# Altium PCB Rocket_Stack_Template_v1.PcbDoc
Units mil, origin at the board's own origin, x right, y up, seen from the top; angles counter-clockwise.
Board outline 2366.3 x 3345.45 mil, 2 copper layers (Top Layer, Bottom Layer); 3 components, 29 nets, 32 pads, 0 vias.
Unrouted connection lines stored in the file: 1.
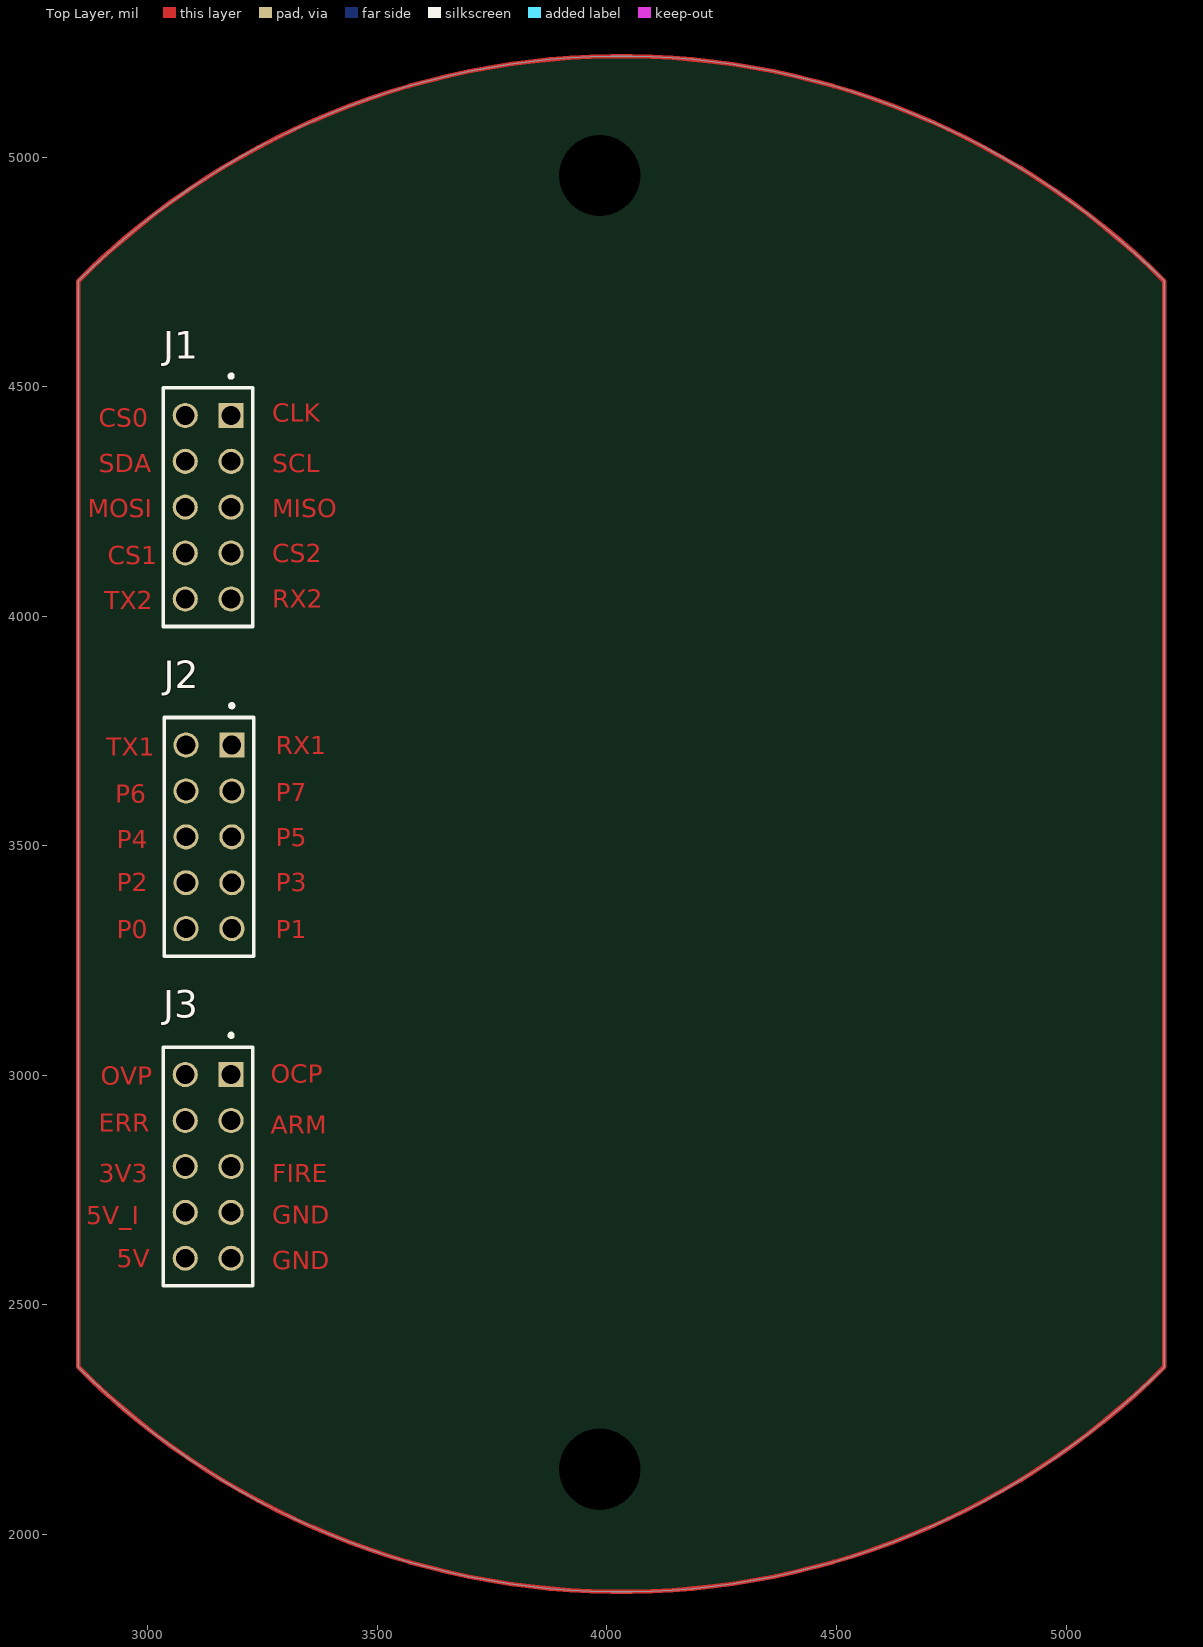
[diagram p0: Top Layer view]
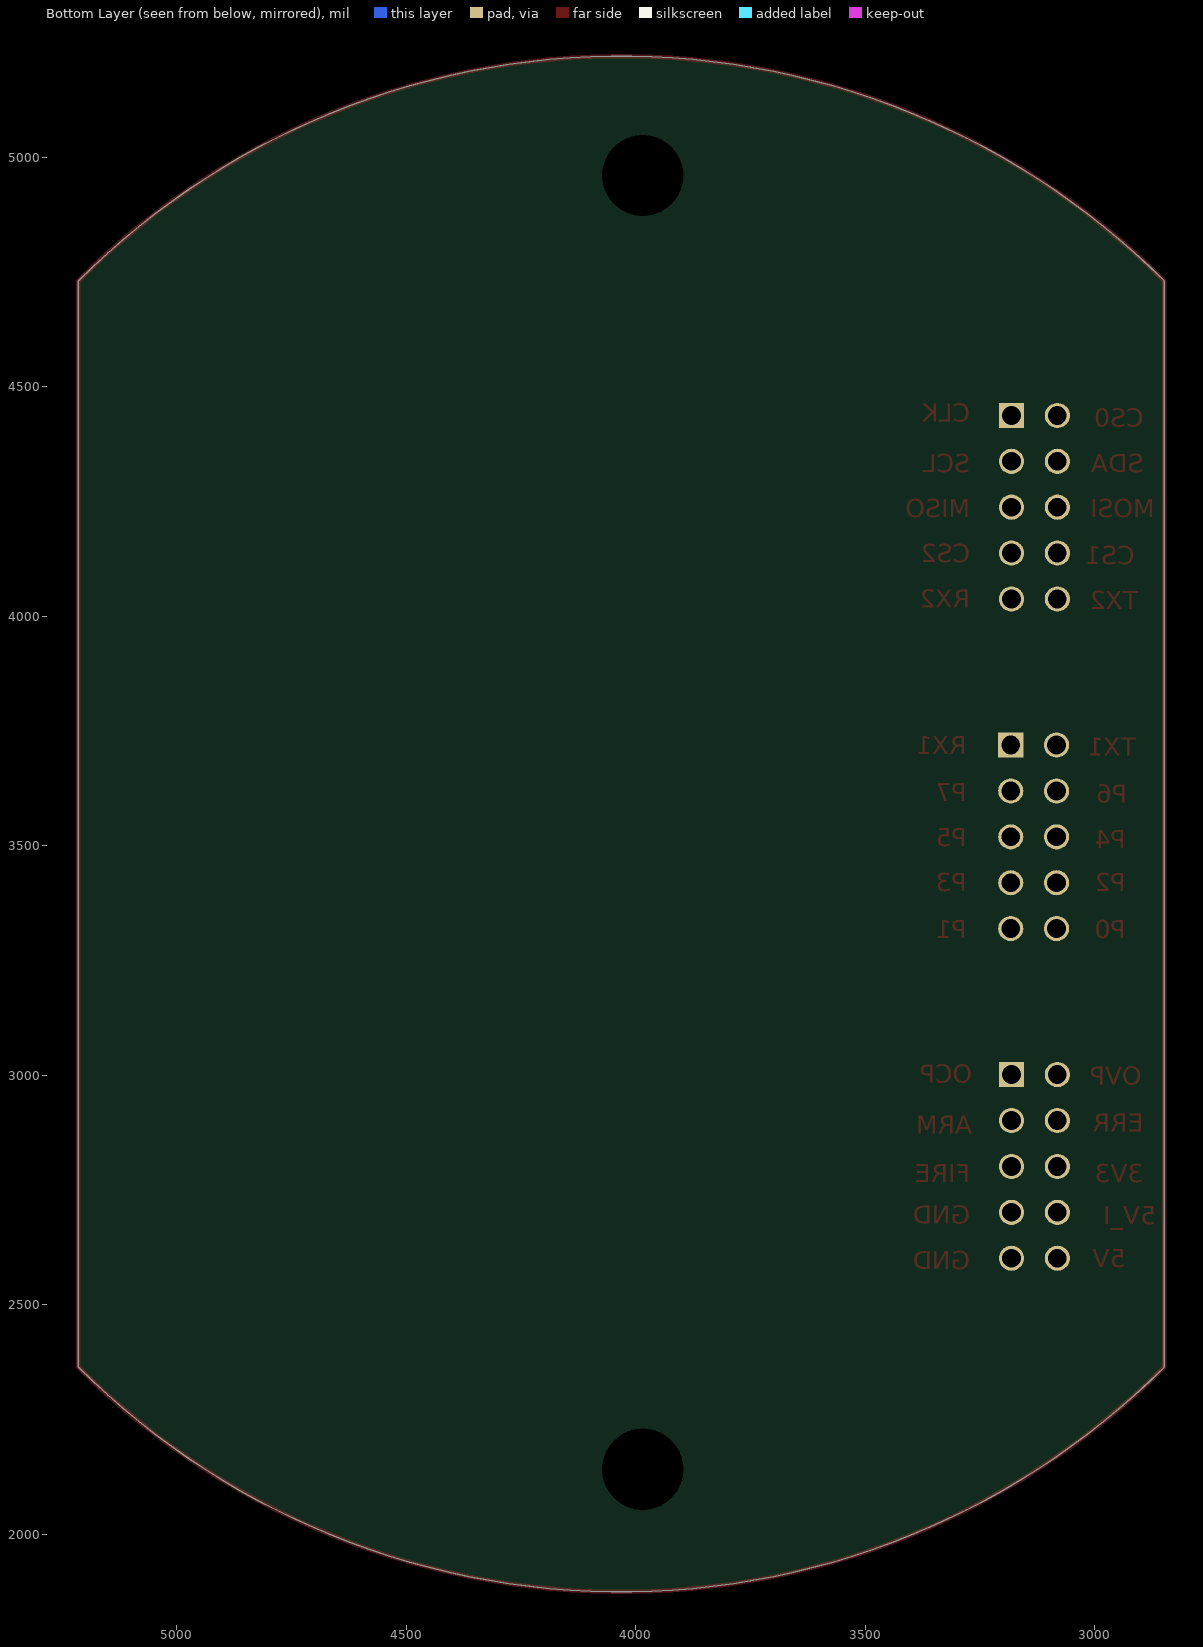
[diagram p1: Bottom Layer view, seen from below]

## Layer stack, top to bottom
Top Solder: solder mask 0.4, Solder Resist, Dk 3.5
Top Layer: signal copper 1.4
Dielectric 1: dielectric 12.6, FR-4, Dk 4.8
Bottom Layer: signal copper 1.4
Bottom Solder: solder mask 0.4, Solder Resist, Dk 3.5

## Board outline
2847.97,2364.8 ccw(c4031.12,3547.95) 5214.27,2364.8 5214.27,4730.4 ccw(c4031.12,3547.24) 2847.97,4730.4

## Design rules (kind name [scope] priority, off if disabled: settings)
Clearance [All] p1: gap=10 ignorepadtopadclearanceinfootprint=FALSE
PolygonConnect [All] p1: connectstyle=Relief reliefconductorwidth=10 reliefentries=4 polygonreliefangle="90 Angle" airgapwidth=10
RoutingVias [All] p1: holewidth=28 width=50 viastyle="Through Hole" minholewidth=28 minwidth=50 maxholewidth=28 maxwidth=50
SolderMaskExpansion [All] p1: expansion=4 istentingtop=FALSE
SupplyNets "Schematic Supply Nets_28" [InNet('USART1_TX')] p1: voltage=0.000
SupplyNets "Schematic Supply Nets_27" [InNet('GPIO4')] p2: voltage=0.000
SupplyNets "Schematic Supply Nets_26" [InNet('GPIO1')] p3: voltage=0.000
SupplyNets "Schematic Supply Nets_25" [InNet('GPIO3')] p4: voltage=0.000
SupplyNets "Schematic Supply Nets_24" [InNet('GPIO5')] p5: voltage=0.000
SupplyNets "Schematic Supply Nets_23" [InNet('USART1_RX')] p6: voltage=0.000
SupplyNets "Schematic Supply Nets_22" [InNet('GPIO2')] p7: voltage=0.000
SupplyNets "Schematic Supply Nets_21" [InNet('GPIO0')] p8: voltage=0.000
SupplyNets "Schematic Supply Nets_20" [InNet('GPIO6')] p9: voltage=0.000
SupplyNets "Schematic Supply Nets_19" [InNet('GPIO7')] p10: voltage=0.000
SupplyNets "Schematic Supply Nets_18" [InNet('GND')] p11: voltage=0.000
SupplyNets "Schematic Supply Nets_17" [InNet('5V')] p12: voltage=0.000
SupplyNets "Schematic Supply Nets_16" [InNet('OVP')] p13: voltage=0.000
SupplyNets "Schematic Supply Nets_15" [InNet('SPI_MISO')] p14: voltage=0.000
SupplyNets "Schematic Supply Nets_14" [InNet('CS0')] p15: voltage=0.000
SupplyNets "Schematic Supply Nets_13" [InNet('ARM')] p16: voltage=0.000
SupplyNets "Schematic Supply Nets_12" [InNet('12C_SDA')] p17: voltage=0.000
SupplyNets "Schematic Supply Nets_11" [InNet('FIRE')] p18: voltage=0.000
SupplyNets "Schematic Supply Nets_10" [InNet('5V_ISO')] p19: voltage=0.000
SupplyNets "Schematic Supply Nets_9" [InNet('USART2_TX')] p20: voltage=0.000
SupplyNets "Schematic Supply Nets_8" [InNet('SPI_CLK')] p21: voltage=0.000
SupplyNets "Schematic Supply Nets_7" [InNet('USART2_RX')] p22: voltage=0.000
SupplyNets "Schematic Supply Nets_6" [InNet('3V3')] p23: voltage=0.000
SupplyNets "Schematic Supply Nets_5" [InNet('CS1')] p24: voltage=0.000
SupplyNets "Schematic Supply Nets_4" [InNet('ERR')] p25: voltage=0.000
SupplyNets "Schematic Supply Nets_3" [InNet('OCP')] p26: voltage=0.000
SupplyNets "Schematic Supply Nets_2" [InNet('I2C_SCL')] p27: voltage=0.000
SupplyNets "Schematic Supply Nets_1" [InNet('CS2')] p28: voltage=0.000
SupplyNets "Schematic Supply Nets" [InNet('SPI_MOSI')] p29: voltage=0.000
Width [All] p1: maxlimit=10 minlimit=10 preferedwidth=10
30 further rules are at their usual default settings.

## Components (designator, comment, footprint, x,y, rotation, side; value= is the part's Value field where it differs from the comment)
J1 "SSW-105-02-G-D" SAMTEC_SSW-105-02-G-D 3181.1,4437.8 r90 top locked
J2 "SSW-105-02-G-D" SAMTEC_SSW-105-02-G-D 3182.68,3719.68 r90 top
J3 "SSW-105-02-G-D" SAMTEC_SSW-105-02-G-D 3181.1,3001.57 r90 top locked

## Footprints (in the part's own frame and the unit in brackets; to place one, negate y for a bottom-side part, rotate by r counter-clockwise, add the part's x,y. Pads: shape width x height; smd on the part's side, far side on the other; paste and mask are expansions set on the pad)
SAMTEC_SSW-105-02-G-D [mm]
  rect 1.39x1.39 hole 1.04: 01(0,0)
  round 1.39 hole 1.04: 02(0,2.54) 03(-2.54,0) 04(-2.54,2.54) 05(-5.08,0) 06(-5.08,2.54) 07(-7.62,0) 08(-7.62,2.54) 09(-10.16,0) 10(-10.16,2.54)
  silkscreen extent -11.69,-1.21 2.27,3.75

## Part data
J1 J2 J3: Package=None, Availability=Unavailable, MF="Samtec Inc.", MP=SSW-105-02-G-D, Price=None

## Free pads (board coordinates)
  round 0 hole 177.17 unplated: 1(3984.25,2141.73) 1(3984.25,4960.63)

## Nets (pads, with @x,y where several pads share a name; then routed paths per layer and width w, separated by ;. In a path a pad name is that pad's centre, name@x,y a point inside that pad or via, vN(x,y) a via of type N, cw(c..) or ccw(c..) an arc to the next point about the centre after c; other vN are vias at no path point)
3V3: J3.06
5V: J3.10
5V_ISO: J3.08
12C_SDA: J1.04
ARM: J3.03
CS0: J1.02
CS1: J1.08
CS2: J1.07
ERR: J3.04
FIRE: J3.05
GND: J3.07 J3.09
GPIO0: J2.10
GPIO1: J2.09
GPIO2: J2.08
GPIO3: J2.07
GPIO4: J2.06
GPIO5: J2.05
GPIO6: J2.04
GPIO7: J2.03
I2C_SCL: J1.03
OCP: J3.01
OVP: J3.02
SPI_CLK: J1.01
SPI_MISO: J1.05
SPI_MOSI: J1.06
USART1_RX: J2.01
USART1_TX: J2.02
USART2_RX: J1.09
USART2_TX: J1.10
copper on no net: | length 9987.8
  Top Layer w10: 2847.97,2364.8 ccw(c4031.12,3547.95) 5214.27,2364.8 5214.27,4730.4 ccw(c4031.12,3547.24) 2847.97,4730.4 2847.97,2364.8

## Other copper
Top Layer:
  text "CLK" at 3270.87,4424.41 h39.37
  text "CS0" at 2892.91,4412.6 h39.37
  text "SDA" at 2892.91,4314.17 h39.37
  text "SCL" at 3270.87,4314.17 h39.37
  text "MOSI" at 2869.29,4215.75 h39.37
  text "MISO" at 3270.87,4215.75 h39.37
  text "CS2" at 3270.87,4117.32 h39.37
  text "CS1" at 2912.6,4113.39 h39.37
  text "RX2" at 3270.87,4018.9 h39.37
  text "TX2" at 2904.72,4014.96 h39.37
  text "RX1" at 3278.74,3700 h39.37
  text "TX1" at 2908.66,3696.06 h39.37
  text "P7" at 3278.74,3597.64 h39.37
  text "P6" at 2928.35,3593.7 h39.37
  text "P5" at 3278.74,3499.21 h39.37
  text "P4" at 2932.28,3495.28 h39.37
  text "P2" at 2932.28,3400.79 h39.37
  text "P3" at 3278.74,3400.79 h39.37
  text "P0" at 2932.28,3298.43 h39.37
  text "P1" at 3278.74,3298.43 h39.37
  text "OCP" at 3266.93,2983.46 h39.37
  text "OVP" at 2896.85,2979.53 h39.37
  text "ERR" at 2892.91,2877.17 h39.37
  text "ARM" at 3266.93,2873.23 h39.37
  text "3V3" at 2892.91,2766.93 h39.37
  text "FIRE" at 3270.87,2766.93 h39.37
  text "GND" at 3270.87,2676.38 h39.37
  text "5V_I" at 2865.35,2675.06 h39.37
  text "5V" at 2932.28,2581.89 h39.37
  text "GND" at 3270.87,2577.95 h39.37